# Altium PCB PCB1.PcbDoc
Units mm, origin at the board's own origin, x right, y up, seen from the top; angles counter-clockwise.
Board outline 49.91 x 51.82 mm, 2 copper layers (Top Layer, Bottom Layer), stack 1.569 mm thick; 4 components, 4 nets, 12 pads, 0 vias.
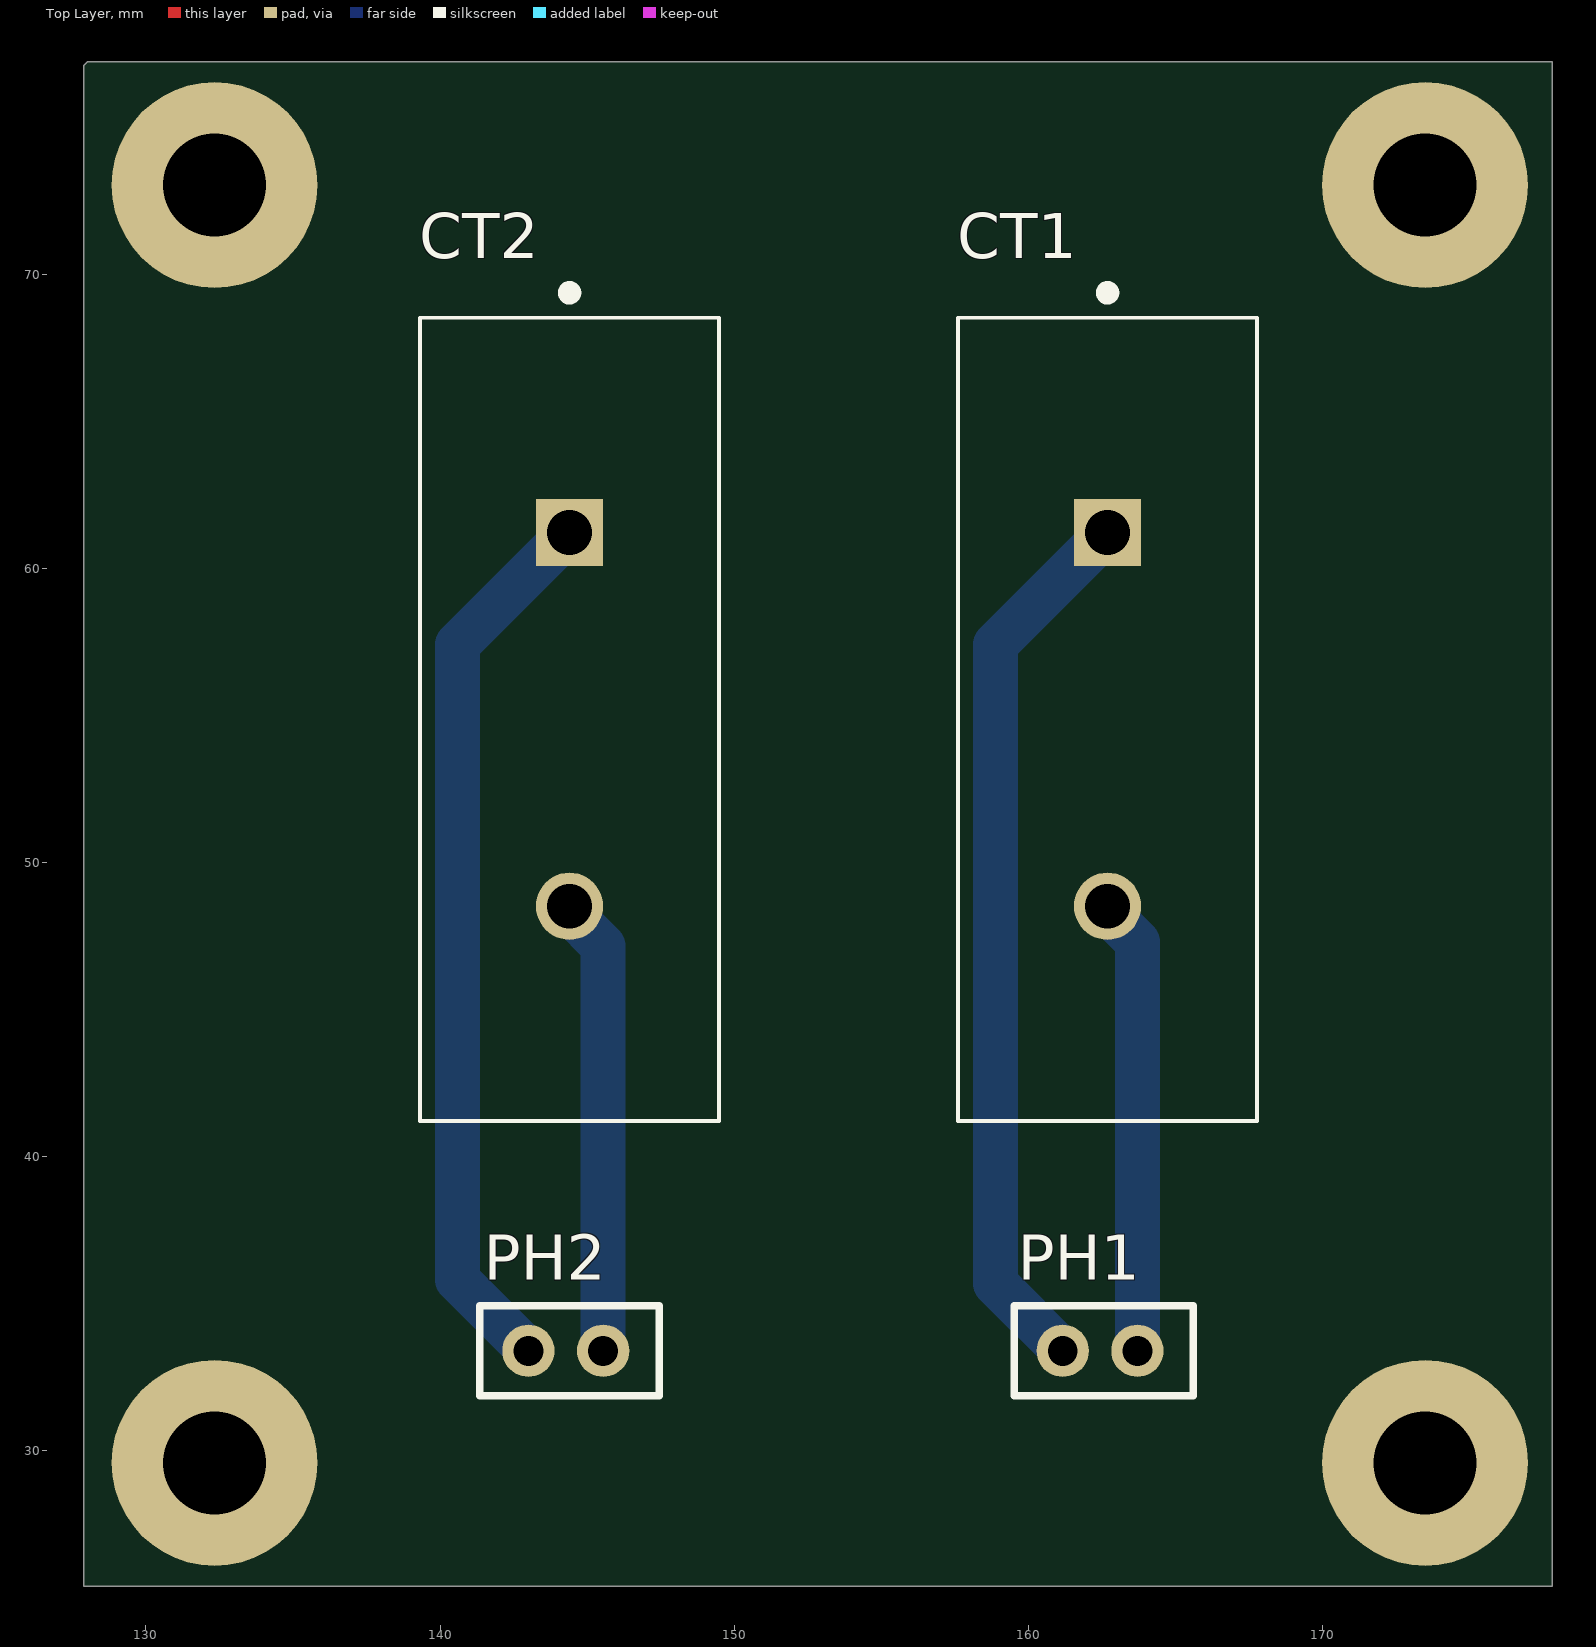
[diagram p0: Top Layer view]
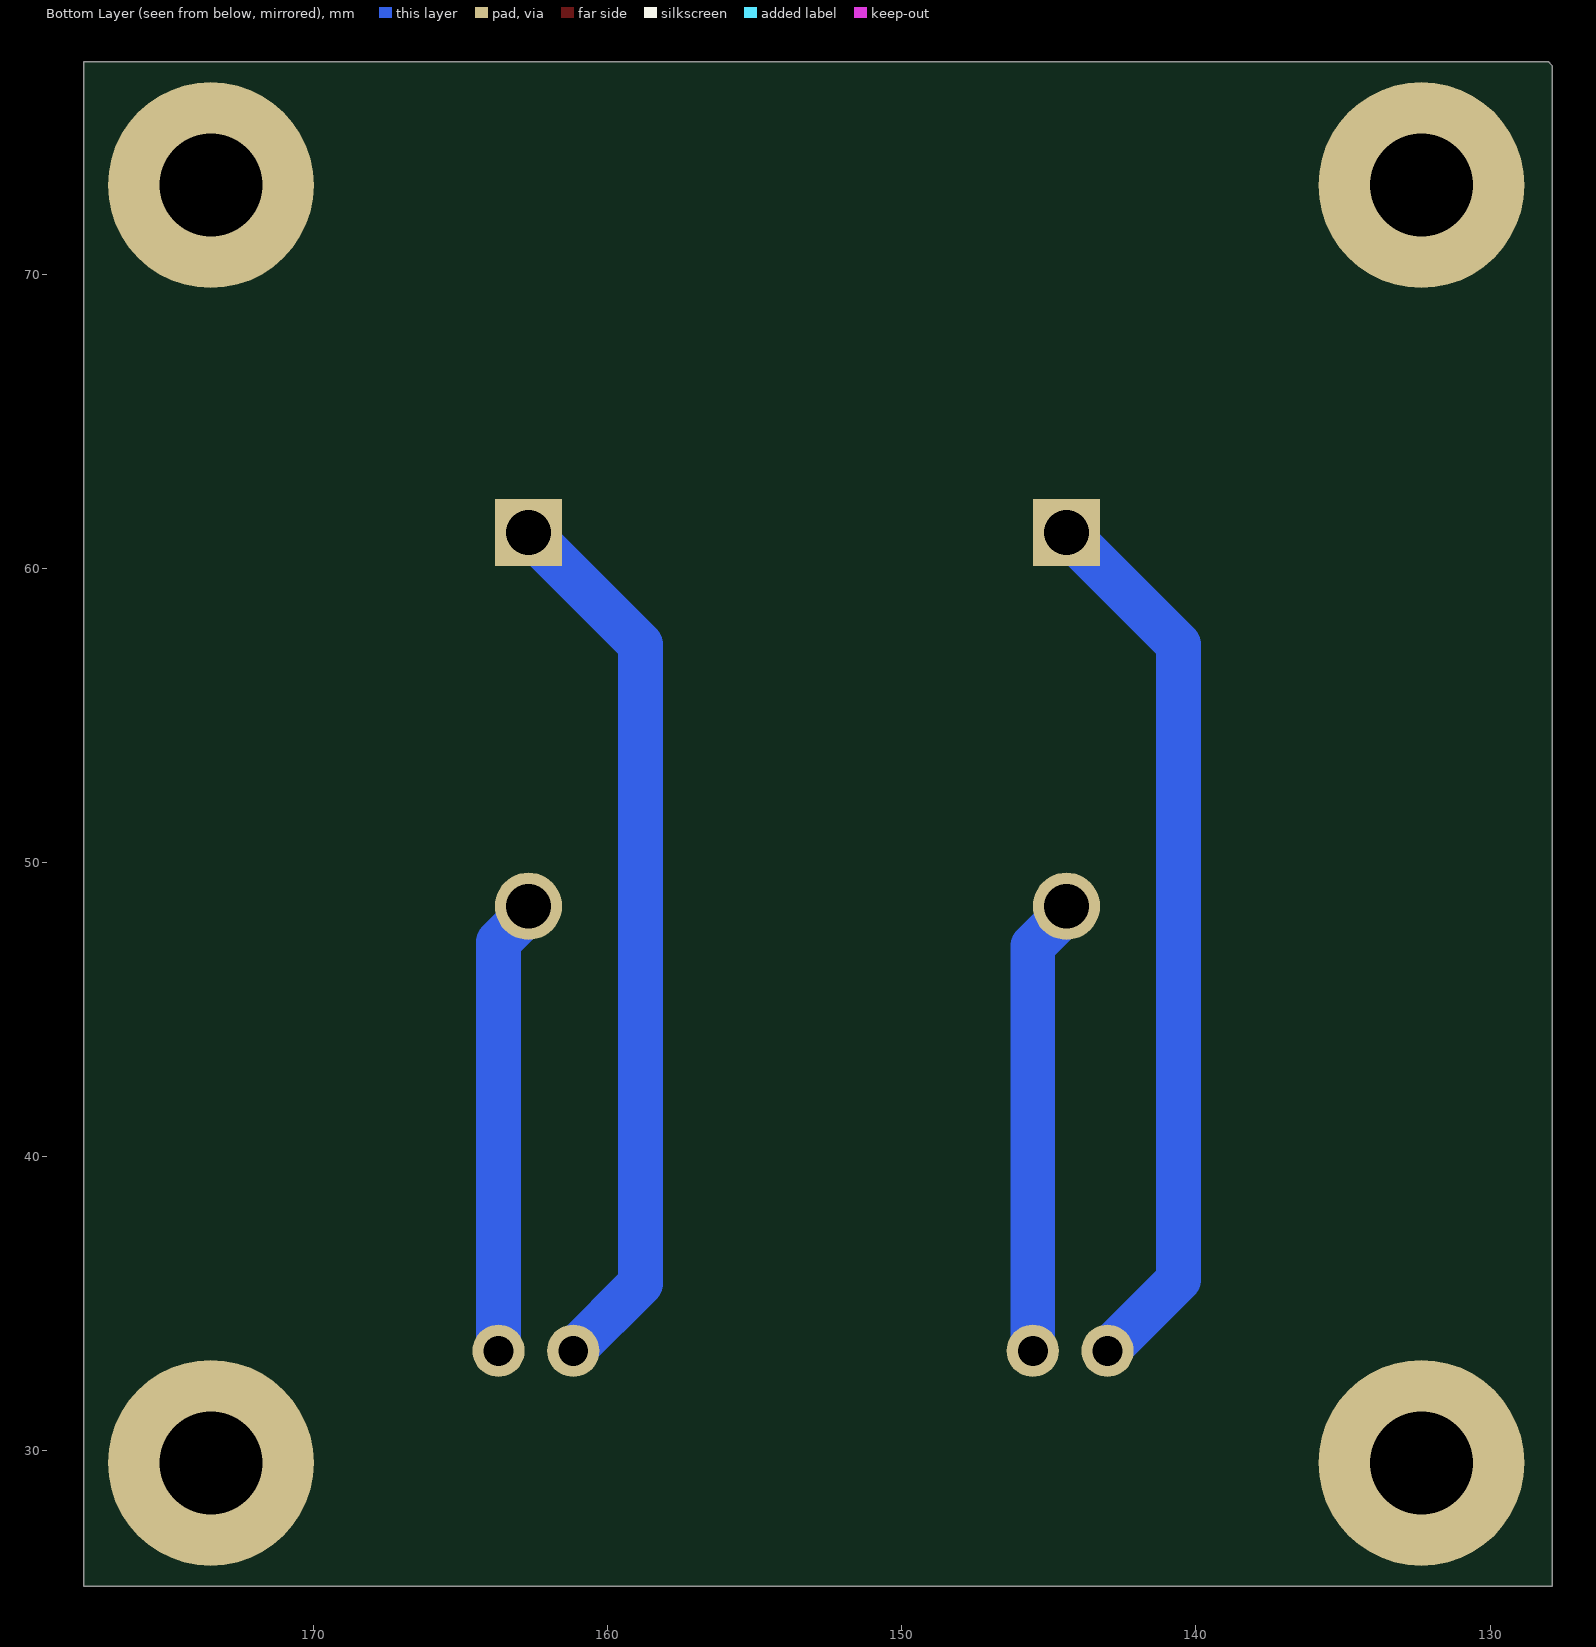
[diagram p1: Bottom Layer view, seen from below]

## Layer stack, top to bottom
Top Solder: solder mask 0.0254, SM-001, Dk 4
Top Layer: signal copper 0.035
Dielectric 1: core 1.4986, Core-043, Dk 4.3
Bottom Layer: signal copper 0.035
Bottom Solder: solder mask 0.0254, SM-001, Dk 4

## Board outline
127.889,25.4 127.889,77.089 128.016,77.216 177.8,77.216 177.8,25.4

## Design rules (kind name [scope] priority, off if disabled: settings)
Clearance [All] p1: gap=0.254 ignorepadtopadclearanceinfootprint=FALSE except(0: Arc-Hole Track-Hole SMDPad-Hole THPad-Hole Via-Hole Fill-Hole Poly-Hole Region-Hole Text-Hole)
PolygonConnect [All] p1: connectstyle=Relief reliefconductorwidth=0.254 reliefentries=4 polygonreliefangle="90 Angle" airgapwidth=0.254
RoutingVias [All] p1: holewidth=0.711 width=1.27 viastyle="Through Hole" minholewidth=0.711 minwidth=1.27 maxholewidth=0.711 maxwidth=1.27
SolderMaskExpansion [All] p1: expansion=0.102 istentingtop=FALSE
Width [All] p1: maxlimit=5.08 minlimit=0.254 preferedwidth=1.016 toplayer_maxwidth=0.254 toplayer_prefwidth=0.254 bottomlayer_minwidth=0.508 minimp=50.000000 maximp=50.000000 favimp=50.000000
30 further rules are at their usual default settings.

## Components (designator, comment, footprint, x,y, rotation, side; value= is the part's Value field where it differs from the comment)
CT1 "CT206-3A" CT206-3A 162.687,61.214 r270 top
CT2 "CT206-3A" CT206-3A 144.399,61.214 r270 top
PH1 "PinHead2" PinHead2 163.703,33.401 r180 top
PH2 "PinHead2" PinHead2 145.542,33.401 r180 top

## Footprints (in the part's own frame and the unit in brackets; to place one, negate y for a bottom-side part, rotate by r counter-clockwise, add the part's x,y. Pads: shape width x height; smd on the part's side, far side on the other; paste and mask are expansions set on the pad)
CT206-3A [mil]
  rect 90x90 hole 60: 1(0,0)
  round 90 hole 60: 2(500,0)
  silkscreen extent -329,-200 788,200
PinHead2 [mil]
  round 70 hole 40: 1(0,0) 2(100,0)
  silkscreen extent -75,-60 165,60

## Part data
CT1 CT2: "PTH Current Transformer"

## Free pads (board coordinates)
  round 7 hole 3.5: 1(132.334,29.591) 2(173.482,29.591) 3(173.482,73.025) 4(132.334,73.025)

## Nets (pads, with @x,y where several pads share a name; then routed paths per layer and width w, separated by ;. In a path a pad name is that pad's centre, name@x,y a point inside that pad or via, vN(x,y) a via of type N, cw(c..) or ccw(c..) an arc to the next point about the centre after c; other vN are vias at no path point)
NetCT1_1: CT1.1 PH1.2 | length 30.3
  Bottom Layer w1.524: PH1.2 158.877,35.687 158.877,57.404 CT1.1
NetCT1_2: CT1.2 PH1.1 | length 15.5
  Bottom Layer w1.524: CT1.2 162.687,48.308 163.703,47.292 PH1.1
NetCT2_1: CT2.1 PH2.2 | length 30.4
  Bottom Layer w1.524: PH2.2 140.589,35.814 140.589,57.404 CT2.1
NetCT2_2: CT2.2 PH2.1 | length 15.6
  Bottom Layer w1.524: CT2.2 144.399,48.308 145.542,47.165 PH2.1